# Allegro board CC3200 AUDIO BOOSTERPACK Rev 3.0-A_BRD.brd
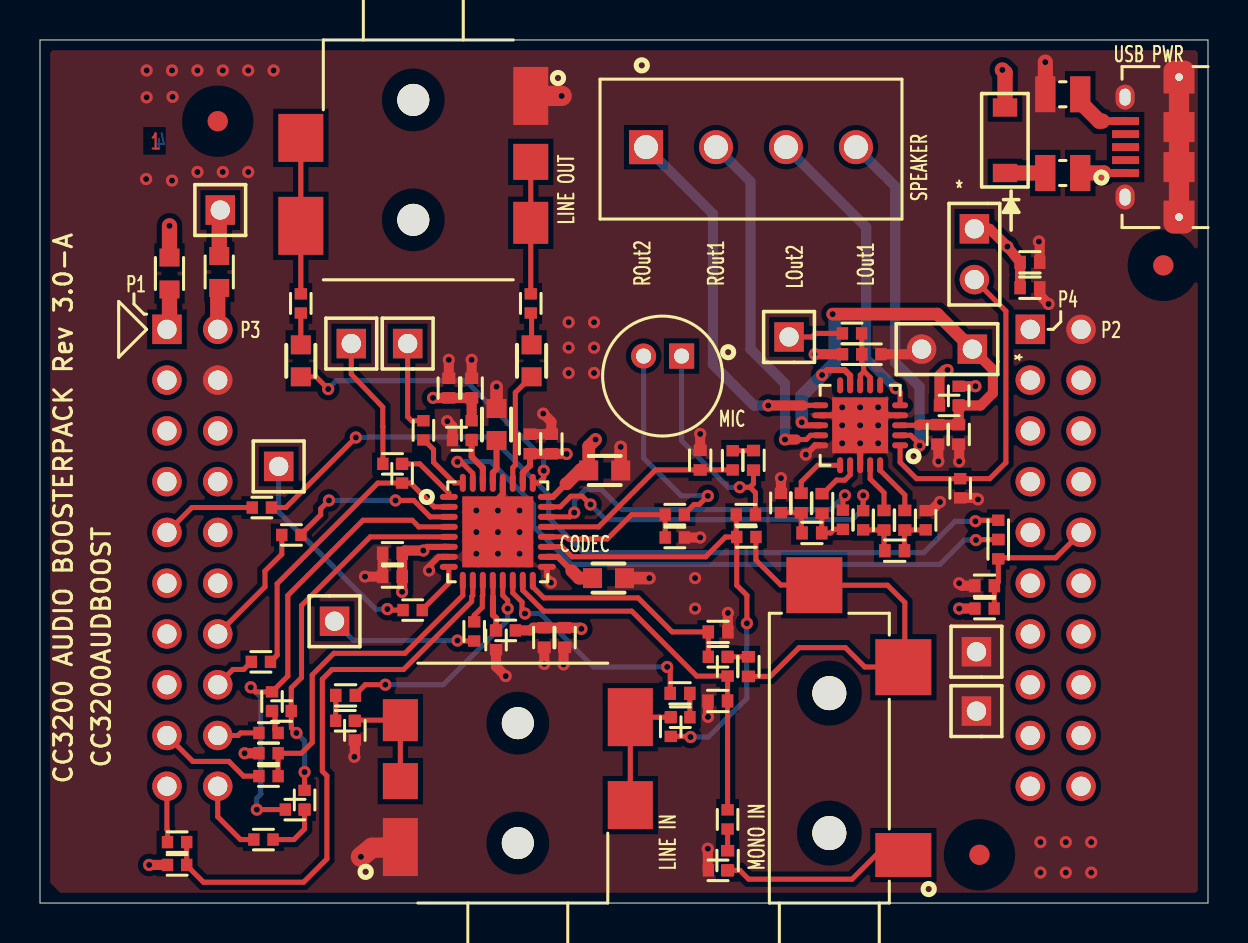
[diagram p0: board, top side]
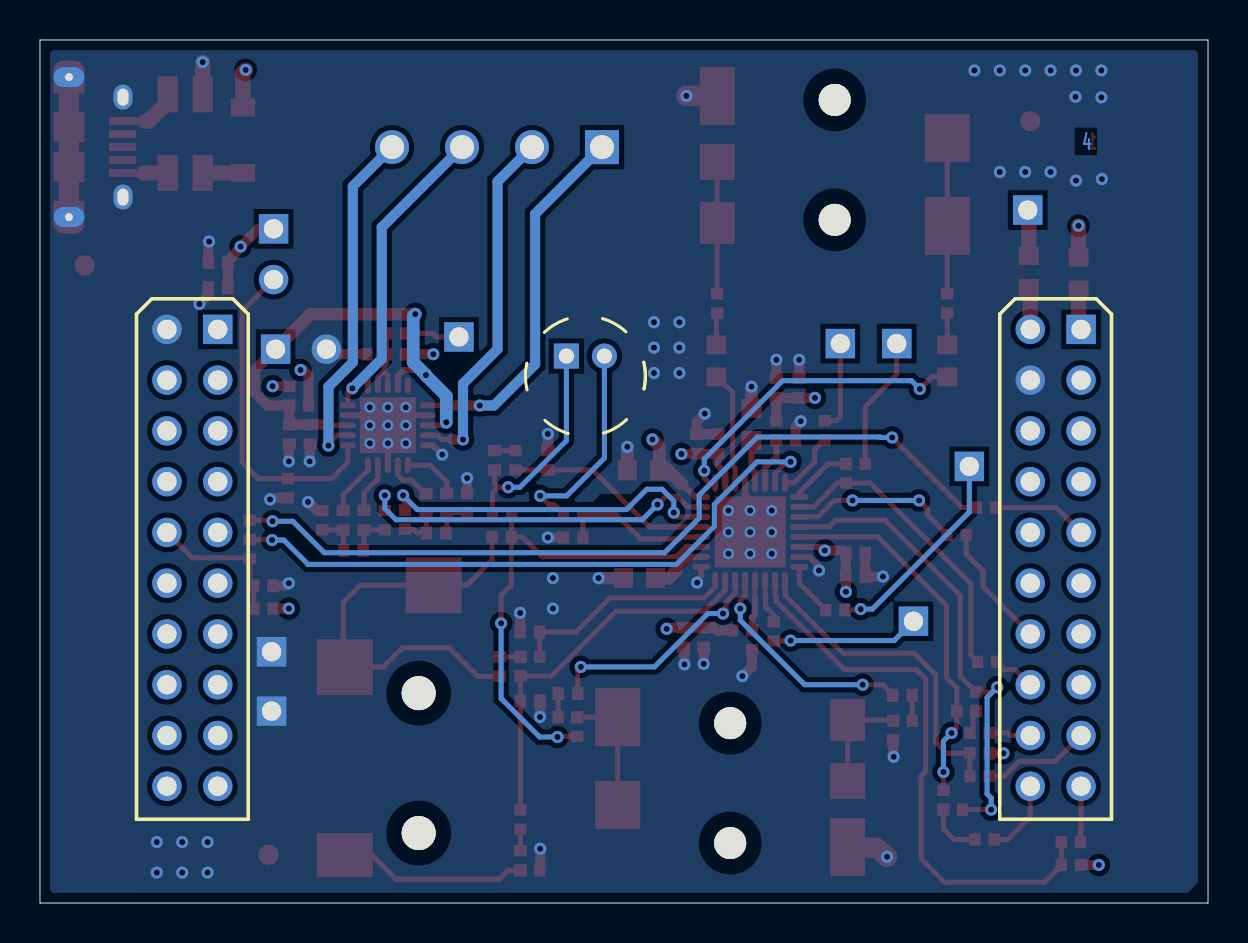
[diagram p1: board, bottom side, seen from below]

Outline 58.42 x 43.18 mm; copper layers: TOP, GND, PWR, BOTTOM. Coordinates in mm from the lower left corner of the outline.
Outline path: 0,43.18 0,0 58.42,0 58.42,43.18 0,43.18

## Placement (name value [footprint] x y rotation side)
C39  1uF  [CC0402]  25.58 22.97 90 top
C40  0.1uF  [CC0402]  24.51 22.97 90 top
C43  0.1uF  [CC0402]  15.28 10.39 180 top
C47  1uF  [CC0402]  26.24 13.28 270 top
C48  0.1uF  [CC0402]  25.22 13.28 270 top
C49  1uF  [CC0402]  17.63 16.33 180 top
C50  0.1uF  [CC0402]  17.63 17.5 180 top
C51  1uF  [CC0402]  45.95 23.44 270 top
C52  0.1uF  [CC0402]  44.91 23.44 270 top
C53  1uF  [CC0402]  49.51 30.78 0 top
C54  0.1uF  [CC0402]  49.51 32.05 0 top
C69  1uF  [CC0402]  20.45 25.76 90 top
C70  0.1uF  [CC0402]  21.59 25.76 90 top
C71  10uF  [CC0603]  22.83 23.94 90 top
C72  10uF  [CC0603]  28.24 21.64 0 top
C73  10uF  [CC0603]  28.44 16.26 0 top
C74  1uF  [CC0402]  35.43 11.83 270 top
C75  0.1uF  [CC0402]  43.26 19.15 90 top
C76  0.1uF  [CC0402]  42.21 19.15 90 top
C77  4700pF  [CC0402]  42.75 17.63 0 top
C78  0.1uF  [CC0402]  38.07 20.02 90 top
C79  0.1uF  [CC0402]  39.12 19.99 90 top
C80  4700pF  [CC0402]  38.61 18.52 180 top
C82  0.1uF  [CC0402]  32.01 10.49 0 top
C83  NC  [CC0402]  34.39 2.13 270 top
C85  1uF  [CC0402]  35.69 22.15 270 top
C87  47uF  [CC0603]  24.59 27.13 90 top
C88  47uF  [CC0603]  13.05 27.13 90 top
C89  NC  [CC0402]  33.9 10.11 0 top
C90  NC  [CC0402]  33.92 13.56 180 top
C91  NC  [CC0402]  33.02 22.16 270 top
C92  0.1uF  [CC0402]  47.24 15.88 0 top
D3  MBR130_SOD-123_2P  [SOD_123FL]  48.27 38.16 90 top
J1  CONN_RCPT_10x2  [HDR_THVT_2X10_100_F]  6.35 28.7 180 bottom
J2  CONN_RCPT_10x2  [HDR_THVT_2X10_100_F]  49.53 28.7 180 bottom
J3  PHONOJACK_STEREO_15  [CUI_SJ1-3515-SMT]  23.6 6 90 top
J4  PHONOJACK_STEREO_15  [CUI_SJ1-3515-SMT]  18.97 37.18 270 top
J5  CP-3523MJTR-ND  [CUI_MJ-3523-SMT]  39.48 7.25 270 top
J18  CONN_MICRO_USB  [FCI_10118194-0001]  56.89 37.82 90 top
JP6  Jumper_1x2_100_430L  [HDR_THVT_1X2_100_M]  46.74 33.73 0 top
L8  BEAD_FERRITE  [INDC0805]  51.16 36.53 180 top
L9  BEAD_FERRITE  [INDC0805]  51.16 40.46 0 top
NOREF  -  []  0 0 90 top
NOREF#2  -  [unnamed#2]  56.18 31.9 0 top
NOREF#3  -  [unnamed#2]  8.89 39.12 0 top
NOREF#4  -  []  0 0 0 top
NOREF#5  -  [unnamed#2]  46.99 2.41 0 top
R1  0 R  [RC0402]  22.81 13.16 270 top
R2  NC  [RC0402]  23.29 13.64 180 top
R8  0 R  [RC0402]  12.57 18.41 0 top
R15  10K  [RC0402]  46.02 20.75 270 top
R16  0 R  [RC0402]  40.62 27.46 0 top
R17  NC  [RC0402]  41.58 27.46 0 top
R24  0 R  [RC0402]  18.64 14.66 0 top
R25  0 R  [RC0402]  21.72 13.59 90 top
R26  0 R  [RC0402]  19.18 23.65 270 top
R31  0 R  [RC0402]  18.11 21.49 270 top
R32  0 R  [RC0402]  11.1 19.79 0 top
R33  0 R  [RC0402]  11.05 12.06 0 top
R35  0 R  [RC0402]  11.43 8.51 0 top
R37  0 R  [RC0402]  11.18 3.17 0 top
R39  0 R  [RC0402]  17.63 21.97 180 top
R40  0 R  [RC0402]  15.27 9.12 180 top
R41  0 R  [RC0402]  32.03 9.3 0 top
R42  0 R  [RC0402]  24.55 30 270 top
R43  0 R  [RC0402]  13.05 30 270 top
R44  0 R  [RC0402]  21.59 23.65 270 top
R45  NC  [RC0402]  21.11 23.16 180 top
R46  NC  [RC0402]  47.93 18.67 270 top
R47  0 R  [RC0402]  47.93 17.7 90 top
R48  NC  [RC0402]  40.61 28.5 0 top
R49  NC  [RC0402]  34.39 11.83 90 top
R50  0 R  [RC0402]  33.91 12.32 0 top
R51  10K  [RC0402]  35.33 18.31 0 top
R53  1K  [RC0402]  40.16 19.18 270 top
R54  0 R  [RC0402]  11.43 6.35 0 top
R55  0 R  [RC0402]  6.86 3.05 0 top
R56  NC  [RC0402]  15.75 8.64 90 top
R57  NC  [RC0402]  31.55 8.82 90 top
R58  RES0603  [RC0603]  8.97 31.57 90 top
R59  RES0603  [RC0603]  6.48 31.5 270 top
R60  NC  [RC0402]  34.39 4.18 270 top
R61  0 R  [RC0402]  33.91 1.64 0 top
R62  NC  [RC0402]  12.09 9.61 0 top
R63  0 R  [RC0402]  11.61 10.08 90 top
R64  NC  [RC0402]  12.75 4.67 180 top
R65  0 R  [RC0402]  13.23 5.16 90 top
R69  0 R  [RC0402]  34.65 22.15 90 top
R70  2.2K  [RC0402]  35.31 19.43 0 top
R71  0 R  [RC0402]  45.47 24.89 0 top
R72  NC  [RC0402]  45.95 25.37 270 top
R73  0 R  [RC0402]  31.75 19.43 0 top
R74  1K  [RC0402]  41.17 19.15 270 top
R75  0 R  [RC0402]  44.3 19.15 270 top
R76  0 R  [RC0402]  37.06 20.02 90 top
R77  0 R  [RC0402]  31.75 18.29 180 top
R78  3.3K  [RC0402]  11.43 7.49 0 top
R79  3.3K  [RC0402]  6.86 1.91 0 top
R80  10K  [RC0402]  47.24 14.73 0 top
TP9  TP THRU  [HDR_THVT_1X1_100_M]  9.02 34.67 0 top
TP10  TP THRU  [HDR_THVT_1X1_100_M]  11.94 21.84 0 top
TP11  TP THRU  [HDR_THVT_1X1_100_M]  14.73 14.1 180 top
TP12  TP THRU  [HDR_THVT_1X1_100_M]  18.39 27.99 0 top
TP13  TP THRU  [HDR_THVT_1X1_100_M]  15.57 27.99 0 top
TP14  TP THRU  [HDR_THVT_1X1_100_M]  37.47 28.32 0 top
TP15  TP THRU  [HDR_THVT_1X1_100_M]  46.84 12.57 0 top
TP16  TP THRU  [HDR_THVT_1X1_100_M]  46.84 9.6 0 top
U3  TLV320AIC3254  [QFN50P500X500X100-33NB]  22.9 18.57 0 top
U4  OSTTE040104  [ON-SHORE_OSCTTE040104]  30.31 37.82 0 top
U6  MIC  [CUI_CMC-2242PBL-A]  32.09 27.37 90 top
U7  AEC  [HDR_THVT_1X2_100_M]  46.63 27.71 270 top
U8  TPA2012D2RTJ  [QFN50P400X400X80-21N]  41.02 23.9 180 top

## Library data of the parts
C39 C40 C43 C47-C54 C69 C70 C74-C80 C82 C83 C85 C89-C92 = CAP0402
C71-C73 C87 C88 = CAP0603
D3 = MBR130_SOD-123_2P
J1 J2 = CONN_RCPT_10X2
J3 J4 = PHONOJACK_STEREO_15
J5 = PHONEJACK_1
J18 = CONN_MICRO_USB_5P_6G
JP6 = Jumper_1x2_100_430L
L8 L9 = BEAD_FERRITE
R1 R2 R8 R15-R17 R24-R26 R31-R33 R35 R37 R39-R51 R53-R57 R60-R65 R69-R80 = RESISTOR
R58 R59 = RES0603
TP9-TP16 = TEST_POINT_THRU
U3 = TLV320AIC3254_1
U4 = OSTTE040104
U6 = MIC
U7 = AEC
U8 = TPA2012D2RTJ

## Footprints (pads in the part's own frame, mm; a bottom-side part is the same pattern mirrored in y, then rotated)
CC0402
  rect 0.579x0.66 smd: 1(-0.49,0) 2(0.49,0)
CC0603
  rect 0.95x1.001 smd: 1(-0.8,0) 2(0.8,0)
CUI_CMC-2242PBL-A
  rect 1.255x1.255 hole 0.754: 1(0,0)
  round 1.255 hole 0.754: 2(0,1.9)
CUI_MJ-3523-SMT
  round 1.699 hole 1.699 unplated: (-3.251,0) (3.749,0)
  rect 2.2x2.799 smd: 1(4.849,3.701)
  rect 2.799x2.799 smd: 2(-4.549,3.701) 10(-8.651,-0.749)
CUI_SJ1-3515-SMT
  round 1.6 hole 1.6 unplated: (-3,-0.3) (3,-0.3)
  rect 2.901x1.75 smd: 1(-3.2,5.575)
  rect 2.901x2.25 smd: 2(3.299,-5.926)
  rect 2.101x1.75 smd: 3(3.15,5.575)
  rect 2.4x2.25 smd: 4(-1.1,-5.926)
  rect 1.801x1.75 smd: 5(0.099,5.575)
FCI_10118194-0001
  rect 0.399x1.349 smd: 1(-1.3,2.591) 2(-0.65,2.591) 3(0,2.591) 4(0.65,2.591) 5(1.3,2.591)
  oval 1.25x0.95 hole 0.851x0.551: G1(-2.499,2.616) G2(2.499,2.616)
  custom 1.643x1.549 hole 1.151x0.5: G3(-3.5,-0.084) G6(3.5,-0.084)
  rect 1.501x1.549 smd: G4(-1.001,-0.084) G5(1.001,-0.084)
HDR_THVT_1X1_100_M
  rect 1.473x1.473 hole 0.965: 1(0,0)
HDR_THVT_1X2_100_M
  rect 1.473x1.473 hole 0.965: 1(0,0)
  round 1.473 hole 0.965: 2(0,-2.54)
HDR_THVT_2X10_100_F
  rect 1.473x1.473 hole 0.965: 1(0,0)
  round 1.473 hole 0.965: 2(-2.54,0) 3(0,-2.54) 4(-2.54,-2.54) 5(0,-5.08) 6(-2.54,-5.08) 7(0,-7.62) 8(-2.54,-7.62) 9(0,-10.16) 10(-2.54,-10.16) 11(0,-12.7) 12(-2.54,-12.7) 13(0,-15.24) 14(-2.54,-15.24) 15(0,-17.78) 16(-2.54,-17.78) 17(0,-20.32) 18(-2.54,-20.32) 19(0,-22.86) 20(-2.54,-22.86)
INDC0805
  rect 1.016x1.801 smd: 1(-0.874,0) 2(0.874,0)
ON-SHORE_OSCTTE040104
  rect 1.699x1.699 hole 1.199: 1(0,0)
  round 1.699 hole 1.199: 2(3.5,0) 3(7,0) 4(10.5,0)
QFN50P400X400X80-21N
  oval 0.8x0.3 smd: 1(-1.999,1.001) 2(-1.999,0.5) 3(-1.999,0) 4(-1.999,-0.5) 5(-1.999,-1.001) 11(1.999,-1.001) 12(1.999,-0.5) 13(1.999,0) 14(1.999,0.5) 15(1.999,1.001)
  oval 0.3x0.8 smd: 6(-1.001,-1.999) 7(-0.5,-1.999) 8(0,-1.999) 9(0.5,-1.999) 10(1.001,-1.999) 16(1.001,1.999) 17(0.5,1.999) 18(0,1.999) 19(-0.5,1.999) 20(-1.001,1.999)
  rect 2.799x2.799 smd: 21(0,0)
QFN50P500X500X100-33NB
  oval 0.899x0.3 smd: 1(-2.451,1.75) 2(-2.451,1.25) 3(-2.451,0.749) 4(-2.451,0.249) 5(-2.451,-0.249) 6(-2.451,-0.749) 7(-2.451,-1.25) 8(-2.451,-1.75) 17(2.451,-1.75) 18(2.451,-1.25) 19(2.451,-0.749) 20(2.451,-0.249) 21(2.451,0.249) 22(2.451,0.749) 23(2.451,1.25) 24(2.451,1.75)
  oval 0.3x0.899 smd: 9(-1.75,-2.451) 10(-1.25,-2.451) 11(-0.749,-2.451) 12(-0.249,-2.451) 13(0.249,-2.451) 14(0.749,-2.451) 15(1.25,-2.451) 16(1.75,-2.451) 25(1.75,2.451) 26(1.25,2.451) 27(0.749,2.451) 28(0.249,2.451) 29(-0.249,2.451) 30(-0.749,2.451) 31(-1.25,2.451) 32(-1.75,2.451)
  rect 3.551x3.551 smd: 33(0,0)
RC0402
  rect 0.569x0.62 smd: 1(-0.48,0) 2(0.48,0)
RC0603
  rect 0.899x1.001 smd: 1(-0.8,0) 2(0.8,0)
SOD_123FL
  rect 0.914x1.219 smd: 1(-1.638,0) 2(1.638,0)
unnamed#2
  round 1.016 smd: 1(0,0)

## Nets
AVDD: C72.1 R16.1 U3.24(AVDD)
GND: C39.2 C40.2 C47.2 C48.2 C49.2 C50.2 C51.2 C52.2 C53.2 C54.2 C69.2 C70.2 C71.2 C72.2 C73.2 C89.1 C90.1 C91.1 C92.1 J1.4 J2.2 J3.1 J4.1 J18.G1 J18.G2 J18.G3 J18.G4 J18.G5 J18.G6 L9.1(Z1) R1.2 R15.2 R17.2 R45.2 R56.1 R61.1 R75.1 R76.2 R77.1 TP15.1 TP16.1 U3.7(IOVSS) U3.17(AVSS) U3.28(DVSS) U3.33(GND) U7.2 U8.4(PGND1) U8.12(PGND2) U8.15(G0) U8.18(AGND) U8.21(EP)
VCC_3V3: C39.1 C40.1 C47.1 C48.1 C49.1 C50.1 C53.1 C54.1 C69.1 C70.1 JP6.1 R2.1 R44.1 R59.1 R71.1 R78.1 R79.1 R80.1 U3.6(IOVDD) U3.26(LDOIN)
VCC_5V: J1.2 R58.1
VCC_5V_MCU: D3.2(CATHODE) R72.1
AA_LOL: R53.1 U3.22(LOL)
AA_LOR: R74.1 U3.23(LOR)
BCLK_IN: R31.2 R33.2 U3.2(BCLK)
BCLK_J3: J1.16 R33.1
CODEC_RESET: R32.2 R46.1
CONN_SCL: R54.2 R78.2 U3.9(SCL/NSS)
CONN_SDA: R55.2 R79.2 U3.10(SDA/MOSI)
DIN: R63.2 R64.2 U3.4(DIN/MFP1)
DIN_J3: J1.18 R35.1
DOUT: R62.2 R65.2 U3.5(DOUT/MFP2)
DOUT_J3: J1.20 R37.1
FSYNC_IN: R8.2 U3.3(WCLK)
FSYNC_J3: J1.14 R8.1
LOUT1: U4.4 U8.2(OUTL+)
LOUT2: U4.3 U8.5(OUTL-)
MASTER_RESET: C92.2 J2.10 R47.1 R80.2
MICBIAS: R51.1 R57.1 R70.1 U3.19(MICBIAS)
RESET_OUT: R46.2 R47.2 U3.31(NRESET)
ROUT1: U4.2 U8.14(OUTR+)
ROUT2: U4.1 U8.11(OUTR-)
SJ_HPL: C88.1 U3.25(HPL)
SJ_HPR: C87.1 U3.27(HPR)
SJ_IN1L: C43.1 U3.13(IN1L)
SJ_IN1R: C82.1 U3.14(IN1R)
SJ_IN2L: C89.2 R49.1 R60.1 U3.15(IN2L)
SJ_IN2R: C90.2 R50.1 U3.16(IN2R)
SJ_IN3L: R73.1 R77.2 U3.20(IN3_L)
SJ_IN3R: C91.2 R69.1 U3.21(IN3_R)
N03569: R44.2 R45.1 U3.30(LDO_SELECT)
N04160: R1.1 R2.2 U3.12(SPI_SELECT)
N05241: J3.3 J3.5 R40.1 R56.2
N05322: J3.2 J3.4 R41.1 R57.2
N07117: J4.3 J4.5 R42.1
N07137: J4.2 J4.4 R43.1
N07821: R31.1 R39.1 U3.1(MCLK)
N09271: R37.2 R64.1 R65.1
N09355: R35.2 R62.1 R63.1
N13860: R16.2 R17.1 R48.2 U8.7(S\D\L\) U8.8(S\D\R\)
N13992: JP6.2 R15.1 U8.1(G1)
N14068: C51.1 C52.1 R71.2 R72.2 U7.1 U8.3(PVDD1) U8.9(AVDD) U8.13(PVDD2)
N14188: C75.2 U8.20(INL+)
N18705: R24.1 TP10.1
N18729: R24.2 U3.8(SCLK/MFP3)
N18777: R25.1 TP11.1
N18809: R25.2 U3.11(MISO/MFP4)
N18858: R26.1 TP12.1
N18892: R26.2 U3.32(GPIO_MFP5)
N19117: J1.1 R59.2
N28715: C71.1 U3.29(DVDD)
N0032514: J1.9 R32.1
N38817: R39.2 TP13.1
N44021: C73.1 U3.18(REF)
N45562: R48.1 TP14.1
N45907: C74.1 R49.2 R50.2
N45975: C74.2 J5.2 J5.10 R51.2
N49985: C75.1 C77.2 R75.2
N49997: C76.1 C77.1 R74.2
N50021: C76.2 U8.19(INL-)
N50694: C78.1 C80.2 R76.1
N50706: C79.1 C80.1 R53.2
N50718: C78.2 U8.16(INR+)
N64646: J1.17 R54.1
N64701: J1.19 R55.1
N70818: R58.2 TP9.1
N71190: C83.2 J5.1 R61.2
N71409: C83.1 R60.2
N72508: R73.2 U6.2
N72564: C85.1 R69.2
N72616: C85.2 R70.2 U6.1
N141157: J18.1(VCC) L8.1(Z1)
N141177: J18.5(GND) L9.2(Z2)
N141213: D3.1(ANODE) L8.2(Z2)
N168908: C79.2 U8.17(INR-)
N394701: C43.2 R40.2
N397271: C82.2 R41.2
N400821: C87.2 R42.2
N401341: C88.2 R43.2

Pads without a net: J1 3 5 6 7 8 10 11 12 13 15; J2 1 3 4 5 6 7 8 9 11 12 13 14 15 16 17 18 19 20; J18 2 3 4; NOREF#2 1; NOREF#3 1; NOREF#5 1; U8 6 10

## Via types
v1: diameter 0.61, hole 0.305, TOP to BOTTOM, 106 vias
v2: diameter 0.559, hole 0.307, TOP to BOTTOM, 18 vias

## Routing (per net, layer and track width the routed paths; a pad name or vN(x,y) marks a point on that pad's centre or on a via; arc(x,y) is an arc through that point)
AVDD: length 5.8
  TOP w0.305: 26.31,20.98 25.65,20.32 U3.24
  TOP w0.508: v1(38.75,27.46) R16.1
  TOP w0.635: v1(27.79,23.19) 27.44,22.85 C72.1 27.05,21.69 26.34,20.98 26.31,20.98
GND: length 50.1
  TOP w0.305: U3.7 19.93,17.32 19.46,16.84 v1(19.46,16.64) ; v1(25.55,16.03) 25.55,16.03 25.55,16.17 25.35,16.37 U3.17 ; v2(41.02,23.9) v2(41.02,23) U8.18 ; v2(41.92,24.8) 42.32,24.4 U8.4 ; U8.12 39.72,24.4 v2(40.12,24.8) ; v1(38.3,22.43) 38.77,22.9 U8.15 ; U3.28 23.15,20.46 22.9,20.22 v2(22.9,19.64)
  TOP w0.508: R75.1 44.58,19.63 v1(45.01,20.07) ; C91.1 v1(33.02,23.47) ; C70.2 v1(21.59,27.18) ; C52.2 44.93,22.93 v1(44.93,22.1) ; R45.2 20.63,23.85 v1(20.37,24.1) ; C40.2 C39.2 25.58,24.08 v1(25.17,24.49) ; v1(26.19,11.94) 26.19,12.74 C47.2 ; C54.2 50,33.06 v1(49.96,33.1) ; v1(23.29,11.35) 22.81,11.84 R1.2 ; v1(45.97,16) 46.1,15.88 C92.1 ; v1(46.91,20.19) 46.84,20.27 R15.2 ; R56.1 15.75,7.34 v1(15.72,7.32) ; v1(50.44,29.97) 50,30.41 C53.2 ; R17.2 43.84,27.46 U7.2 ; C69.2 v1(20.45,27.18) ; C89.1 v1(33.41,9.31) ; C50.2 C49.2 v1(16.26,16.33) ; C51.2 45.97,22.93 v1(45.97,22.1) ; R77.1 v1(33.02,18.29) ; R76.2 v1(37.06,21.26) ; R61.1 33.4,1.67 v1(33.4,2.72) ; C48.2 v1(25.22,11.96) ; C90.1 v1(34.41,14.51)
  TOP w0.635: C72.2 v1(29.04,22.82) ; C71.2 v1(22.83,25.83) ; C73.2 v1(30.48,16.26)
  TOP w0.762: L9.1 v1(50.28,42.07)
  TOP w1.016: J3.1 16.61,2.76 v1(16.05,2.31) ; J18.G6 J18.G5 J18.G4 J18.G3 ; J4.1 v1(26.09,40.38)
  vias: v1(5.33,41.66) v1(5.33,40.31) v1(5.31,36.22) v1(6.6,41.66) v1(6.63,40.34) v1(6.6,36.14) v1(7.87,41.66) v1(7.87,36.58) v1(9.14,41.66) v1(9.14,36.58) v1(10.41,41.66) v1(10.41,36.58) v1(11.68,41.66) v1(26.44,29.06) v1(26.44,27.79) v1(26.44,26.52) v1(27.71,29.06) v1(27.71,27.79) v1(27.71,26.52) v1(32.77,16.26) v1(32.77,14.73) v1(50.04,3.05) v1(50.04,1.52) v1(51.31,3.05) v1(51.31,1.52) v1(52.58,3.05) v1(52.58,1.52) v2(21.82,19.64) v2(21.82,18.56) v2(21.82,17.48) v2(22.9,18.56) v2(22.9,17.48) v2(23.99,19.64) v2(23.99,18.56) v2(23.99,17.48) v2(40.12,23.9) v2(40.12,23) v2(41.02,24.8) v2(41.92,23.9) v2(41.92,23)
VCC_3V3: length 24.6
  TOP w0.305: U3.26 24.15,21.53 24.51,21.89 C40.1 ; U3.6 20.27,17.82 20,17.82 19.35,17.82 v1(19.17,17.64)
  TOP w0.508: R2.1 24.54,13.64 24.67,13.77 C48.1 C47.1 27.02,13.77 v1(27.08,13.72) ; R71.1 44.99,26.41 45.25,26.67 v1(45.39,26.67) ; v1(19.66,25.27) C69.1 C70.1 R44.1 ; JP6.1 47.5,33.73 v1(48.39,32.84) C54.1 C53.1 ; R79.1 v1(5.46,1.91) ; v1(19.17,17.64) 18.25,17.64 C50.1 C49.1 18.12,15.58 v1(18.11,15.57) ; v1(10.23,7.49) R78.1 ; R80.1 v1(45.97,14.73) ; C40.1 C39.1 26.33,22.48 v1(26.34,22.47)
  TOP w0.762: R59.1 v1(6.48,33.88)
VCC_5V: length 2.1
  TOP w0.762: R58.1 8.89,30.7 J1.2
VCC_5V_MCU: length 2.8
  TOP w0.508: R72.1 46.78,25.85 v1(46.79,25.86)
  TOP w0.762: D3.2 48.27,41.55 v1(48.13,41.68)
AA_LOL: length 17.3
  TOP w0.254: R53.1 40.16,20.29 v1(40.26,20.4) ; v1(26.72,19.53) 26.51,19.32 U3.22
  BOTTOM w0.254: v1(26.72,19.53) 26.72,20.12 27.3,20.7 28.07,20.7 29.08,19.68 39.55,19.68 v1(40.26,20.4)
AA_LOR: length 18.2
  TOP w0.254: v1(27.53,19.94) 27.12,20.35 26.55,20.35 26.02,19.82 U3.23 ; R74.1 v1(41.17,20.4)
  BOTTOM w0.254: v1(41.17,20.4) 41.17,19.74 40.61,19.18 28.3,19.18 v1(27.53,19.94)
BCLK_IN: length 15.2
  TOP w0.254: U3.2 19.72,19.82 19.01,20.53 19.01,20.54 18.54,21.01 R31.2 16.9,21.01 11.86,15.98 11.86,12.4 R33.2
BCLK_J3: length 2.2
  TOP w0.254: R33.1 10.19,11.68 9.65,11.68 J1.16
CODEC_RESET: length 41.6
  TOP w0.254: R46.1 46.84,19.15 v1(46.79,19.1) ; v1(15.8,23.29) 12.29,19.79 R32.2
  BOTTOM w0.254: v1(15.8,23.29) 16.38,23.29 16.41,23.32 22.54,23.32 25.45,20.41 25.45,20.01 25.45,19.26 27.18,17.53 44.2,17.53 45.77,19.1 v1(46.79,19.1)
CONN_SCL: length 16.4
  TOP w0.254: R54.2 R78.2 13.08,7.49 13.61,8.03 13.61,11.41 14.7,12.5 18.25,12.5 21.15,15.39 U3.9
CONN_SDA: length 28.2
  TOP w0.254: U3.10 21.65,15.39 21.59,15.33 21.59,15.09 18.19,11.68 14.61,11.68 14.12,11.2 14.12,6.59 14.35,6.37 14.35,2.21 13.18,1.04 8.18,1.04 7.34,1.88 R79.2 R55.2
DIN: length 23.9
  TOP w0.254: R64.2 v1(10.85,4.67) ; U3.4 18.95,18.82 18.95,18.82 18.62,19.15 16.15,19.15 12.4,15.39 12.4,11.35 R63.2 10.77,10.56 v1(10.54,10.79)
  BOTTOM w0.254: v1(10.85,4.67) 10.85,5.26 11.05,5.46 11.05,10.29 v1(10.54,10.79)
DIN_J3: length 2.1
  TOP w0.254: R35.1 10.03,8.51 9.91,8.38 J1.18
DOUT: length 18.5
  TOP w0.254: R65.2 v1(13.23,6.55) ; v1(12.83,8.51) 12.58,8.76 12.58,8.98 12.57,8.99 R62.2 12.57,10.76 13.08,11.28 13.08,14.88 16.52,18.32 U3.5
  BOTTOM w0.254: v1(12.83,8.51) 13.23,8.1 v1(13.23,6.55)
DOUT_J3: length 3.8
  TOP w0.254: R37.1 10.03,3.17 8.89,4.32 J1.20
FSYNC_IN: length 8.6
  TOP w0.254: U3.3 19.52,19.32 18.7,20.14 v1(17.78,20.14) ; v1(14.45,20.14) 14.04,19.73 14.04,19.43 13.05,18.44 R8.2
  BOTTOM w0.254: v1(17.78,20.14) v1(14.45,20.14)
FSYNC_J3: length 6.3
  TOP w0.254: J1.14 11.25,15.82 11.25,16.61 12.09,17.45 R8.1
LOUT1: length 17.5
  TOP w0.254: U8.2 43.55,23.4 43.99,22.96 v1(43.99,22.89)
  BOTTOM w0.508: U4.4 42.77,35.86 42.77,27.05 43.99,25.83 v1(43.99,22.89)
LOUT2: length 15.3
  TOP w0.254: U8.5 43.02,25.56 42.82,25.76 v1(42.8,25.76)
  BOTTOM w0.508: U4.3 41.33,33.8 41.33,27.23 v1(42.8,25.76)
MASTER_RESET: length 7.3
  TOP w0.254: J2.10 50.8,17.27 47.98,17.27 R47.1 47.93,16.07 C92.2 47.73,14.74 R80.2
MICBIAS: length 24.2
  TOP w0.254: R51.1 34.85,15.9 35.36,15.39 v1(35.36,14) ; R51.1 34.83,18.34 R70.1 ; R51.1 34.28,18.31 33.29,17.32 26.61,17.32 26.1,17.83 25.66,17.83 25.66,17.82 U3.19 ; R57.1 32.51,8.34 v1(32.54,8.31)
  BOTTOM w0.254: v1(32.54,8.31) 33.43,8.31 35.36,10.24 v1(35.36,14)
RESET_OUT: length 31.8
  TOP w0.254: v1(46.81,18.16) 46.83,18.18 R47.2 ; U3.31 21.65,21.49 21.07,22.07 v1(20.88,22.07)
  BOTTOM w0.254: v1(46.81,18.16) 46.23,18.16 45.01,16.94 26.59,16.94 24.69,18.84 24.69,19.94 22.56,22.07 v1(20.88,22.07)
ROUT1: length 17.9
  TOP w0.254: 37.82,23.19 38.33,23.19 38.54,23.4 U8.14
  TOP w0.508: v1(37.26,23.19) 37.82,23.19
  BOTTOM w0.508: v1(37.26,23.19) 37.26,25.98 35.53,27.71 35.53,36.1 U4.2
ROUT2: length 18.5
  TOP w0.254: U8.11 38.18,24.9 38.17,24.89
  TOP w0.508: v1(36.42,24.89) 38.17,24.89
  BOTTOM w0.508: v1(36.42,24.89) 35.71,24.89 33.66,26.95 33.66,34.48 U4.1
SJ_HPL: length 15.8
  TOP w0.254: v1(14.41,25.72) 13.8,26.33 C88.1 ; U3.25 24.94,21.02 25.2,21.28 v1(25.2,21.63)
  BOTTOM w0.254: v1(14.41,25.72) 14.83,26.13 21.28,26.13 25.2,22.21 v1(25.2,21.63)
SJ_HPR: length 5.7
  TOP w0.254: C87.1 24.56,26.33 23.77,25.54 23.77,21.91 23.65,21.78 U3.27
SJ_IN1L: length 11.3
  TOP w0.254: v1(17.27,10.92) 16.27,10.92 15.77,10.43 C43.1 ; v1(23.39,14.73) 23.39,15.14 23.15,15.39 U3.13
  BOTTOM w0.254: v1(23.39,14.73) 23.39,14.15 20.17,10.92 v1(17.27,10.92)
SJ_IN1R: length 11.5
  TOP w0.254: v1(24.26,14.48) 24.25,14.48 24.11,14.63 24.11,15.06 23.65,15.52 U3.14 ; C82.1 31.52,11.66 v1(31.37,11.81)
  BOTTOM w0.254: v1(24.26,14.48) 25.02,14.48 27.69,11.81 v1(31.37,11.81)
SJ_IN2L: length 19.2
  TOP w0.254: R60.1 C89.2 R49.1 32.85,11.35 29.6,14.61 25.19,14.61 24.15,15.65 U3.15
SJ_IN2R: length 11.3
  TOP w0.254: R50.1 C90.2 31.62,13.56 29.92,15.27 25.2,15.27 24.65,15.82 U3.16
SJ_IN3L: length 7.6
  TOP w0.254: U3.20 26.33,18.32 26.44,18.21 28.37,18.21 29.59,19.43 R73.1 R77.2
SJ_IN3R: length 10.5
  TOP w0.254: U3.21 27.94,18.82 30.79,21.67 C91.2 R69.1
N03569: length 2.4
  TOP w0.305: R44.2 R45.1 21.59,22.33 22.15,21.78 U3.30
N04160: length 2.5
  TOP w0.254: 22.66,15.32 22.66,16.11 U3.12
  TOP w0.305: 22.66,15.32 22.66,14.41 22.81,14.25 R2.2
N05241: length 5.3
  TOP w0.254: J3.5 J3.3 15.78,9.15 R40.1
N05322: length 6.4
  TOP w0.254: J3.4 J3.2 30.98,9.3 30.98,9.3 R57.2
N07117: length 6.6
  TOP w0.254: R42.1 J4.3 J4.5
N07137: length 7.8
  TOP w0.254: J4.4 J4.2 R43.1
N07821: length 3.1
  TOP w0.254: R31.1 19,21.97 20.45,20.52 U3.1
N09271: length 2.8
  TOP w0.254: R37.2 12.7,3.17 13.23,3.71 R65.1
N09355: length 1.2
  TOP w0.254: R63.1 11.75,9.46 11.75,8.67 R35.2
N13860: length 3.6
  TOP w0.254: 41.2,26.58 41.2,26.9 41.1,27 R17.1 41.1,28.49 R48.2 ; 41.2,26.58 41.03,26.41 41.03,25.91 U8.8 ; 41.2,26.58 41.24,26.58 41.52,26.3 U8.7
N13992: length 16.6
  TOP w0.254: JP6.2 48.31,29.62 48.31,22.04 47.5,21.23 R15.1 43.84,21.23 43.02,22.05 U8.1
N14068: length 25.4
  TOP w0.254: 43.94,23.9 U8.3
  TOP w0.305: U8.9 40.52,26.39 40.24,26.67 39.37,26.67 v1(39.12,26.42) ; v1(38.1,24.05) 38.25,23.9 U8.13
  TOP w0.508: U7.1 47.66,26.69 47.66,25.51 47.04,24.89 R71.2 C51.1 C52.1 43.98,23.93 43.94,23.9
  TOP w0.635: U7.1 44.88,29.46 v1(39.65,29.46)
  BOTTOM w0.635: v1(38.1,24.05) 38.1,25.37 39.12,26.39 v1(39.12,26.42) 39.75,27.05 39.75,29.36 v1(39.65,29.46)
N14188: length 2.8
  TOP w0.254: C75.2 43.26,20.42 42.02,21.65 U8.20
N18705: length 10.5
  TOP w0.254: R24.1 17.42,14.66 v1(17.37,14.71)
  BOTTOM w0.254: TP10.1 11.94,19.56 16.79,14.71 v1(17.37,14.71)
N18729: length 2.7
  TOP w0.254: U3.8 20.45,16.01 19.12,14.68 R24.2
N18777: length 7.4
  TOP w0.254: R25.1 20.9,13.11 v1(20.88,13.13)
  BOTTOM w0.254: v1(20.88,13.13) 15.7,13.13 TP11.1
N18809: length 2.2
  TOP w0.254: R25.2 21.72,14.39 22.12,14.8 22.12,15.36 22.15,15.39 U3.11
N18858: length 4.5
  TOP w0.254: R26.1 18.59,24.13 18.39,24.33 TP12.1
N18892: length 3.2
  TOP w0.254: R26.2 19.2,23.17 19.68,22.69 19.68,22.05 20.72,21.02 U3.32
N19117: length 2
  TOP w0.762: R59.2 6.48,28.83 J1.1
N28715: length 2.2
  TOP w0.305: C71.1 22.83,21.71 22.65,21.53 U3.29
N0032514: length 4.8
  TOP w0.254: J1.9 7.59,19.79 R32.1
N38817: length 6.7
  TOP w0.254: TP13.1 15.57,26.46 17.14,24.81 17.14,23.84 17.15,23.84 R39.2
N44021: length 2.7
  TOP w0.305: U3.18 25.49,17.32 25.9,17.32 26.59,16.62
  TOP w0.635: C73.1 26.96,16.26 26.59,16.62
N45562: length 2.7
  TOP w0.254: R48.1 38.79,28.5 38.61,28.32 TP14.1
N45907: length 1
  TOP w0.254: R50.2 C74.1
N45975: length 21.5
  TOP w0.254: C74.2 36.53,11.34 37.96,12.78 40.28,12.78 41.25,11.81 J5.2 43.26,11.87 43.26,15.04 42.39,15.9 J5.10 37.05,15.91 35.81,17.16 R51.2
N49985: length 2.1
  TOP w0.254: R75.2 44.29,18.66 C75.1 43.24,18.64 C77.2
N49997: length 2.1
  TOP w0.254: R74.2 41.23,18.66 C76.1 42.21,17.67 C77.1
N50021: length 2.5
  TOP w0.254: C76.2 42.21,20.53 41.52,21.22 U8.19
N50694: length 2
  TOP w0.254: R76.1 37.07,19.52 C78.1 38.07,18.56 C80.2
N50706: length 2.1
  TOP w0.254: R53.2 39.73,18.7 39.55,18.52 C80.1 39.1,19.48 C79.1
N50718: length 2.9
  TOP w0.254: C78.2 38.07,21.07 38.9,21.9 U8.16
N64646: length 5.4
  TOP w0.254: R54.1 10.18,6.35 9.45,7.09 7.65,7.09 J1.17
N64701: length 2.8
  TOP w0.254: J1.19 6.35,3.67 6.38,3.64 R55.1
N70818: length 2.3
  TOP w0.762: R58.2 8.97,34.62 TP9.1
N71190: length 9.5
  TOP w0.254: J5.1 41.83,2.41 40.61,1.19 35.44,1.19 35,1.64 R61.2
N71409: length 1.1
  TOP w0.254: C83.1 R60.2
N72508: length 10.7
  TOP w0.254: v1(33.4,20.37) 32.97,19.94 32.71,19.94 32.23,19.46 R73.2
  BOTTOM w0.254: U6.2 30.19,22.26 32.08,20.37 v1(33.4,20.37)
N72564: length 1
  TOP w0.254: R69.2 C85.1
N72616: length 11
  TOP w0.254: 35.51,20.8 35.69,20.98 C85.2 ; 35.51,20.8 35.79,20.53 R70.2 ; 35.51,20.8 v1(35,20.8)
  BOTTOM w0.254: v1(35,20.8) 34.42,20.8 32.09,23.13 U6.1
N141157: length 2.3
  TOP w0.381: 53.22,36.52 J18.1
  TOP w0.762: 53.22,36.52 53.21,36.53 L8.1
N141177: length 3.1
  TOP w0.381: 53.13,39.12 J18.5
  TOP w0.762: 53.13,39.12 52.98,39.12 52.03,40.07 L9.2
N141213: length 2
  TOP w0.762: L8.2 D3.1
N168908: length 2.3
  TOP w0.254: C79.2 39.16,20.48 39.83,21.16 40.26,21.16 40.52,21.42 U8.17
N394701: length 1.3
  TOP w0.254: R40.2 14.79,9.77 14.79,9.78 C43.2
N397271: length 1.2
  TOP w0.254: C82.2 32.51,10.49 R41.2
N400821: length 1.6
  TOP w0.254: C87.2 24.59,29.48 R42.2
N401341: length 1.6
  TOP w0.254: C88.2 R43.2

## Copper pours and planes (outline as drawn; the poured copper is in the pictures)
AVDD on PWR: 27.91,21.18 27.94,21.16 30,21.16 31.01,20.14 35.28,20.14 35.94,20.8 35.94,20.83 37.85,20.83 39.45,22.42 39.45,28.12 38.15,29.41 27.51,29.41 27.3,29.21 27.3,28.7 27.33,28.68 27.33,21.69 27.84,21.18
GND on TOP: 57.79,42.67 57.91,42.55 57.91,0.64 57.79,0.51 53.62,0.51 53.62,0.51 1.01,0.51 0.51,1.02 0.51,42.55 0.63,42.67 ; 7 cut-outs
GND on BOTTOM: 57.79,42.67 57.91,42.55 57.91,0.64 57.79,0.51 53.62,0.51 53.62,0.51 1.01,0.51 0.51,1.02 0.51,42.55 0.63,42.67 ; 3 cut-outs
GND on GND: 57.79,42.67 57.91,42.55 57.91,0.64 57.79,0.51 53.62,0.51 53.62,0.51 1.01,0.51 0.51,1.02 0.51,42.55 0.63,42.67
VCC_3V3 on PWR: 4.8,42.67 38.23,42.67 38.23,30.1 38.1,29.97 27.18,29.97 26.8,29.59 26.8,21.59 27.69,20.7 29.84,20.7 30.99,19.56 35.43,19.56 36.2,20.32 37.72,20.32 37.97,20.07 37.97,19.05 38.48,18.54 44.7,18.54 48.39,22.23 48.39,26.42 47.88,26.92 46.1,26.92 45.97,26.8 45.97,25.78 45.85,25.65 45.21,25.65 45.09,25.78 45.09,38.99 45.72,39.62 48.9,39.62 49.15,39.88 49.15,42.54 49.28,42.67 57.79,42.67 57.91,42.55 57.91,0.64 57.79,0.51 53.62,0.51 53.62,0.51 1.01,0.51 0.64,0.89 0.64,42.55 0.76,42.67 4.8,42.67
VCC_5V_MCU on PWR: 38.66,19.1 38.43,19.33 38.43,20.7 40.01,22.28 40.01,28.32 39.9,28.32 38.71,29.51 38.71,42.62 38.76,42.67 44.47,42.67 44.47,42.67 48.51,42.67 48.64,42.55 48.64,40.26 48.51,40.13 45.48,40.13 45.46,40.13 44.58,39.24 44.58,25.37 44.75,25.2 46.18,25.2 46.43,25.45 46.43,26.52 46.51,26.59 47.47,26.59 47.8,26.26 47.8,22.43 44.48,19.1

## Text on the board
BOTTOM: 4 | LAYER 4-BOTTOM
User.Comments: UNLESS OTHERWISE SPECIFIED | ALL DIMENSIONS ARE IN | INCHES | MILLIMETERS | APRIL 15 2014 | DATE | PART NUMBER: | CC3200 AUDIO BOOSTERPACK | FABRICATION DRAWING | TEXAS INSTRUMENTS | REV 3.0-A | X
TOP: 1 | LAYER 1-TOP
Ref Des/Silkscreen Top: P1 | P3 | CODEC | MIC | P4 | P2 | USB PWR | LINE OUT | ROut2 | LINE IN | ROut1 | MONO IN | LOut2 | LOut1 | SPEAKER | CC3200 AUDIO BOOSTERPACK Rev 3.0-A | CC3200AUDBOOST
GND: 2
PWR: 3
PAGE_OUTLINE: CAD | DATA | DO NOT MANUALLY | UPDATE | D | C | B | A | 8 | 7 | 6 | 5 | 4 | 3 | 2 | 1
DIMENSION: ASSEMBLY TOP
DISPLAY_TOP: SLOT33.5X21.7 | SLOT 45.3X19.7 | 48.228Mils+/-10% | 4-LAYER STACK BUILD | PREPREG   ----->7.086 Mils | PREPREG   ----->2.460 Mils | Cu FOIL   ----->LAYER 1 ----->1.377 Mils | Cu FOIL   ----->LAYER 4 ----->1.377 Mils | GROUND     , LAYER 2   ----->1.377 Mils | CORE      ----->23.622 Mils | POWER     , LAYER 3   ----->1.377 Mils | BOARD DIMENTIONS ARE IN INCHES. | MILS | NOTES: UNLESS OTHERWISE SPECIFIED. | COPPER: AS PER STACKUP. | 5. MINIMUM CONDUCTOR WIDTH:10 MILS | 3. SOLDER MASK MATERIAL SHALL MEET ALL THE REQUIREMENTS OF | IPC-SM-840C AND SHALL BE RED IN COLOR AND APPLIED OVER BARE COPPER. | 4. SILK SCREEN LEGEND TO BE APPLIED PER LAYER STACKUP USING WHITE | NON-CONDUCTIVE EPOXY INK. | 7.ALL VIAS ARE TENTED EXCEPT 12.1 MIL VIAS . | 2. SURFACE FINISH:  ENIG | 8.THIS IS NOT AN IMPEDANCE CONTROL BOARD. | 1. FABRICATE PER IPC-6012A CLASS 2. | 6.SOLDER MASK CLEARANCE IS GIVEN SAME AS PAD SIZE EXCEPT NPTH AND FIDUCIALS. | MINIMUM SPACING:7.53 MILS | VENDER SHALL MODIFY THE MASK CLEARANCE AS PER THE REQUIRED MANUFACTURING TOLERANCE. | DIELECTRIC: FR4
User.5: DATE:APRIL 15 2014 | PART NO/CARD REF: | FILM LAYER: | TESSOLVE | CC3200 AUDIO BOOSTERPACK | JOB NUMBER:TS9136 | REV 3.0-A | DESIGNED BY: | COMPANY NAME : TEXAS INSTRUMENTS
User.6: FABRICATION LAYER
User.7: ASSEMBLY BOTTOM
User.8: FIGURE | SIZE | 12.0 | 12.1 | 29.7 | 38.0 | 47.2 | 63.0 | 66.9 | 33.5x21.7 | 45.3x19.7 | DRILL CHART: TOP to BOTTOM | ALL UNITS ARE IN MILS | TOLERANCE | +0.0/-12.0 | +3.0/-3.0 | +2.0/-2.0 | PLATED | NON-PLATED | QTY | 106 | 18 | 2 | 52 | 4
User.11: LAYER 2-GROUND
User.12: LAYER 3-POWER
User.13: SILKSCREEN BOTTOM
User.14: SILKSCREEN TOP
User.16: SOLDERMASK BOTTOM
User.17: SOLDERMASK TOP
User.18: SOLDERPASTE TOP
User.19: SOLDERPASTE BOTTOM
User.21: BOARD OUTLINE
